# EAGLE board 12VBridgeConnector (EAGLE 9.5.2)
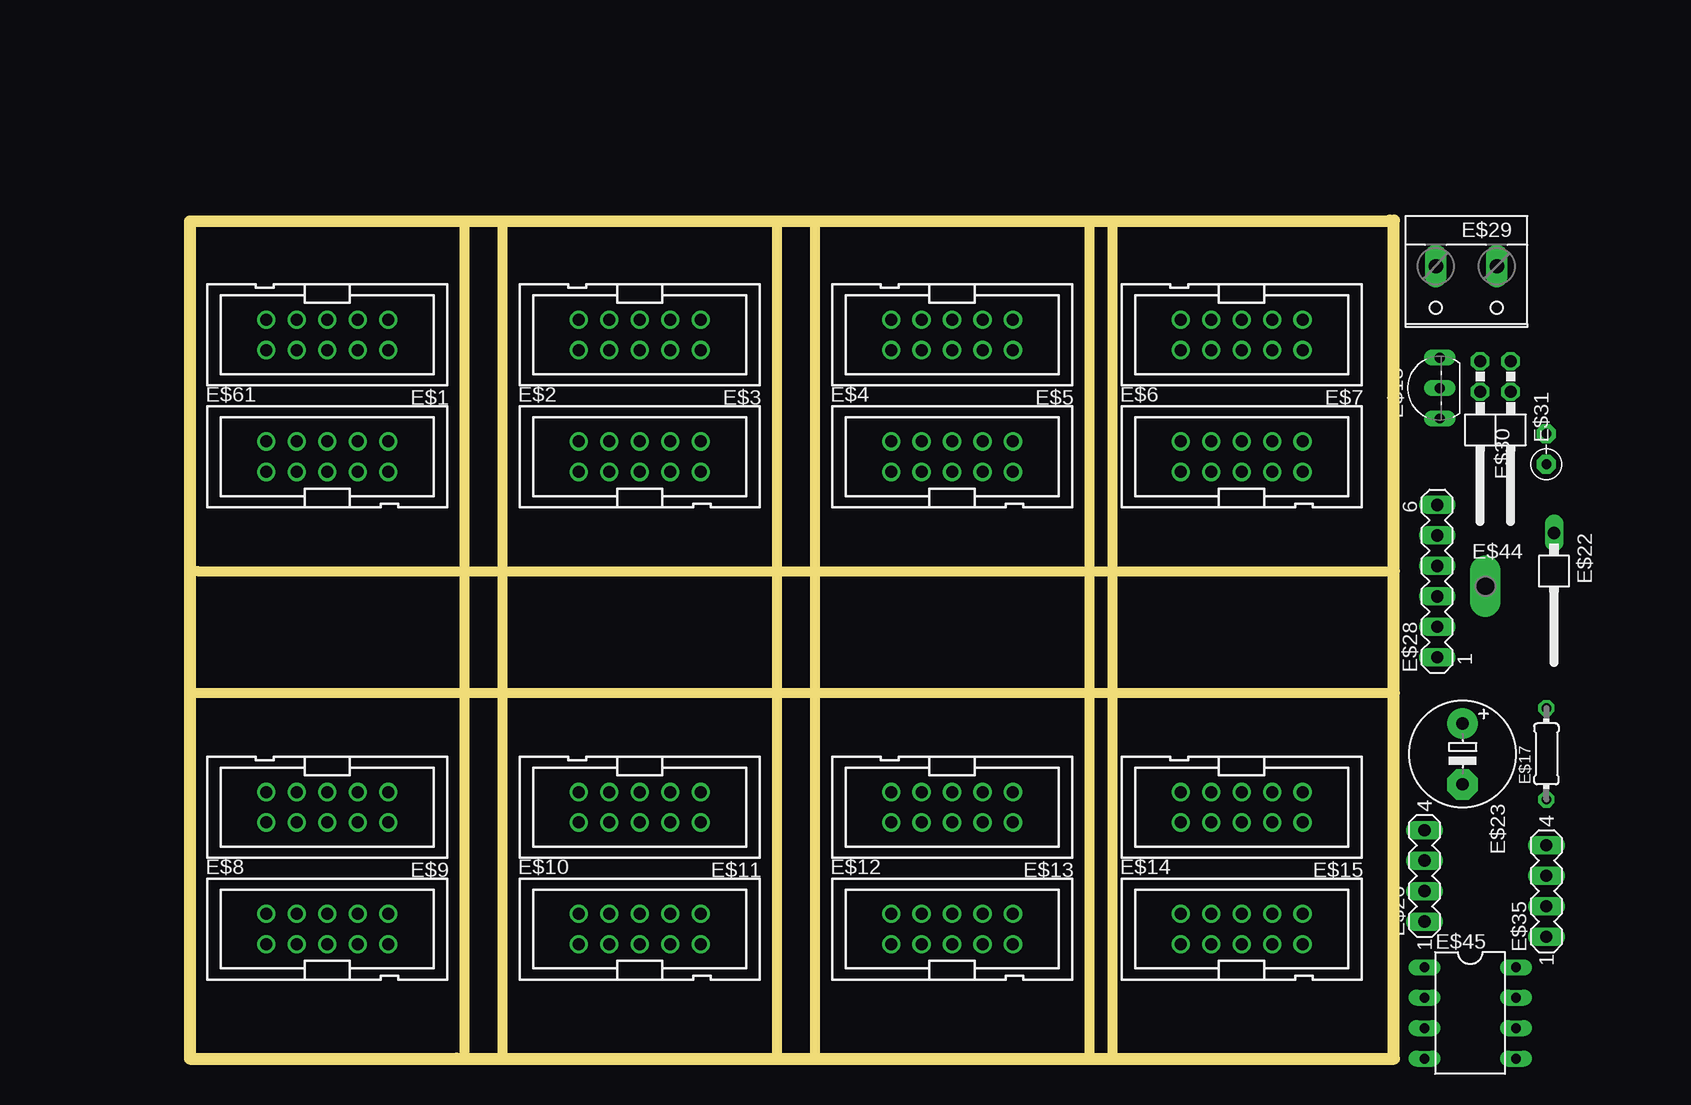
[diagram p0: board, top side]
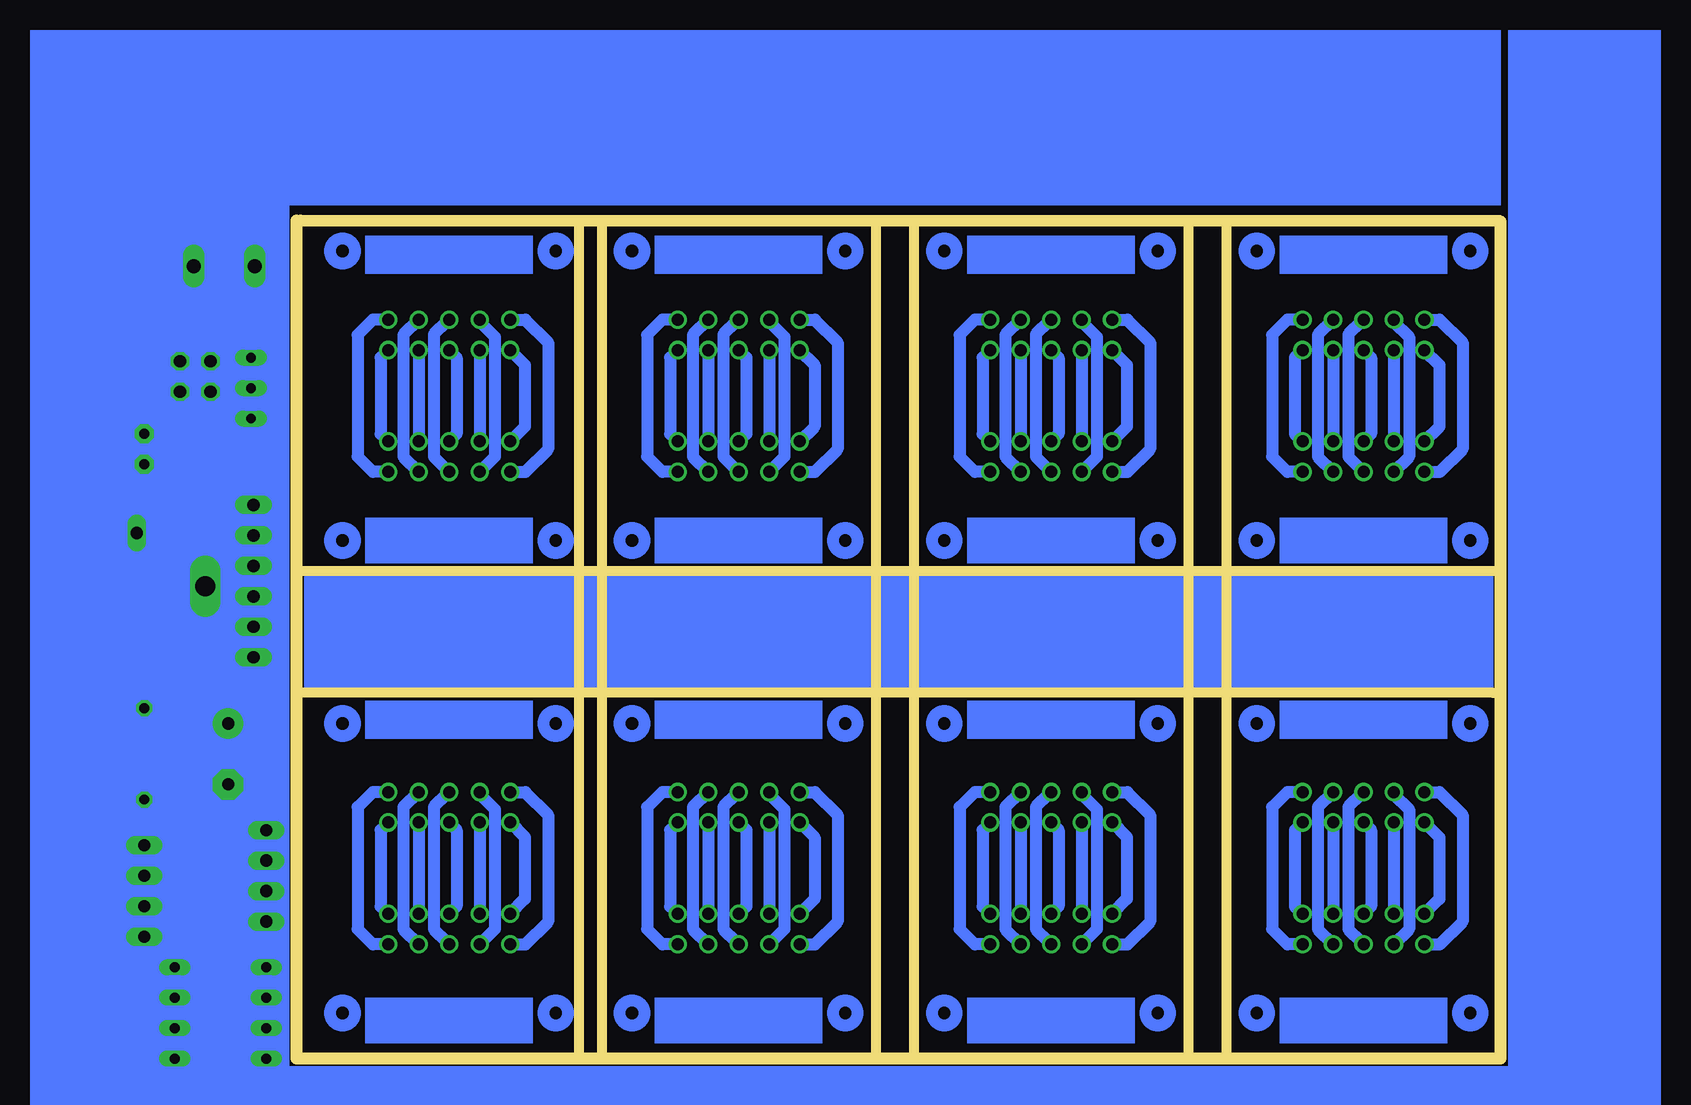
[diagram p1: board, bottom side, seen from below]

Size 100.33 x 69.85 mm. Coordinates in mm from the lower left corner, seen from the top.
Outline: 100,69.85 0,69.78 0,0 22.23,0
Outline: 22.23,0 26.04,0
Outline: 26.04,0 48.9,0
Outline: 48.9,0 52.07,0
Outline: 52.07,0 74.93,0
Outline: 74.93,0 76.83,0
Outline: 76.83,0 100.33,0 100.33,30.48
Outline: 100.33,30.48 100.33,40.64
Outline: 100.33,40.64 100.33,69.85
Outline: 22.86,69.85 22.86,0.64 22.23,0
Outline: 26.04,69.85 26.04,0
Outline: 48.9,69.85 48.9,0
Outline: 52.07,69.85 52.07,0
Outline: 74.93,69.85 74.93,0
Outline: 76.83,69.85 76.83,0
Outline: 0.64,40.64 100.33,40.64
Outline: 0.64,30.48 100.33,30.48
Copper layers (1*16): Top 0.035mm / dielectric 1.5mm / Bottom 0.035mm
Design rules "default": minimum track width 10mil, minimum drill 24mil, track to track 8mil, track to pad 8mil, pad to pad 8mil, via to via 8mil, smd to smd 8mil, copper to edge 40mil, drill to drill 8mil, minimum pad ring 10mil, minimum via ring 8mil, stop-mask expansion 4mil, vias tented up to drill 0mil, thermal gap 10mil

## Footprints (pad centres in the part's own frame; a part is rotated, then mirrored left to right if it is on the bottom)
PAK100/2500-10 = drill 1 pad 1.422: 1 -5.08,-1.27; 2 -5.08,1.27; 3 -2.54,-1.27; 4 -2.54,1.27; 5 0,-1.27; 6 0,1.27; 7 2.54,-1.27; 8 2.54,1.27; 9 5.08,-1.27; 10 5.08,1.27
0204/7 = drill 0.813 octagon: 1 -3.81,0; 2 3.81,0
TO92- = drill 0.813 long: 1 2.54,0; 2 0,0; 3 -2.54,0
1X01/90 = drill 1.016 long: 1 -1.27,-3.81
E5-8,5 = drill 1.016 pad 2.54: + -2.54,0 | drill 1.016 pad 2.54 octagon: - 2.54,0
MA04-1 = drill 1.016 long: 1 -3.81,0; 2 -1.27,0; 3 1.27,0; 4 3.81,0
MA06-1 = drill 1.016 long: 1 -6.35,0; 2 -3.81,0; 3 -1.27,0; 4 1.27,0; 5 3.81,0; 6 6.35,0
W237-132 = drill 1.194 long: 1 -2.54,-0.635; 2 2.54,-0.635
RS-2,5 = drill 0.813 pad 1.6 octagon: 1 -1.27,0; 2 1.27,0
2X02/90 = drill 1.016 octagon: 1 -1.27,-6.35; 2 -1.27,-3.81; 3 1.27,-6.35; 4 1.27,-3.81
P1-17Y = drill 1.702 pad 2.121 long: TP 0,0
DIL08 = drill 0.813 long: 1 -3.81,-3.81; 2 -1.27,-3.81; 3 1.27,-3.81; 4 3.81,-3.81; 5 3.81,3.81; 6 1.27,3.81; 7 -1.27,3.81; 8 -3.81,3.81

## Placement (x,y rotation side)
E$1  [PAK100/2500-10]  11.43,60.33 180 top
E$2  [PAK100/2500-10]  37.47,50.16 0 top
E$3  [PAK100/2500-10]  37.47,60.33 180 top
E$4  [PAK100/2500-10]  63.5,50.16 0 top
E$5  [PAK100/2500-10]  63.5,60.33 180 top
E$6  [PAK100/2500-10]  87.63,50.16 0 top
E$7  [PAK100/2500-10]  87.63,60.33 180 top
E$8  [PAK100/2500-10]  11.43,10.79 0 top
E$9  [PAK100/2500-10]  11.43,20.95 180 top
E$10  [PAK100/2500-10]  37.47,10.79 0 top
E$11  [PAK100/2500-10]  37.47,20.95 180 top
E$12  [PAK100/2500-10]  63.5,10.79 0 top
E$13  [PAK100/2500-10]  63.5,20.95 180 top
E$14  [PAK100/2500-10]  87.63,10.79 0 top
E$15  [PAK100/2500-10]  87.63,20.95 180 top
E$17  [0204/7]  113.03,25.4 90 top  (outside the outline)
E$18  [TO92-]  104.14,55.88 90 top  (outside the outline)
E$22  [1X01/90]  112.39,40.01 180 top  (outside the outline)
E$23  [E5-8,5]  106.05,25.4 270 top  (outside the outline)
E$26  [MA04-1]  102.87,15.24 90 top
E$28  [MA06-1]  103.93,39.79 90 top  (outside the outline)
E$29  [W237-132]  106.36,65.41 180 top  (outside the outline)
E$30  [RS-2,5]  113.03,50.8 90 top  (outside the outline)
E$31  [2X02/90]  108.78,51.77 180 top  (outside the outline)
E$35  [MA04-1]  113.03,13.97 90 top  (outside the outline)
E$44  [P1-17Y]  107.95,39.37 0 top  (outside the outline)
E$45  [DIL08]  106.68,3.81 270 top
E$61  [PAK100/2500-10]  11.43,50.16 0 top

## Library data of the parts
E$1-E$15 E$61 = con-3m
E$17 = eagle-ltspice
E$18 = transistor-fet
E$22 E$31 = pinhead
E$23 = ref-packages-longpad
E$26 E$28 E$35 = con-lstb
E$29 = con-wago-508
E$30 = discrete
E$44 = testpad
E$45 = 74xx-us

## Nets
S$2: E$1.10 E$61.2
S$3: E$1.8 E$61.4
S$4: E$1.6 E$61.6
S$5: E$1.4 E$61.8
S$7: E$1.2 E$61.10
S$8: E$1.9 E$61.1
S$9: E$1.7 E$61.3
S$10: E$1.5 E$61.5
S$11: E$1.3 E$61.7
S$12: E$1.1 E$61.9
S$13: E$2.2 E$3.10
S$14: E$2.4 E$3.8
S$15: E$2.6 E$3.6
S$16: E$2.8 E$3.4
S$17: E$2.10 E$3.2
S$18: E$2.1 E$3.9
S$19: E$2.3 E$3.7
S$20: E$2.5 E$3.5
S$21: E$2.7 E$3.3
S$22: E$2.9 E$3.1
S$23: E$4.2 E$5.10
S$24: E$4.4 E$5.8
S$25: E$4.6 E$5.6
S$26: E$4.8 E$5.4
S$27: E$4.10 E$5.2
S$28: E$4.1 E$5.9
S$29: E$4.3 E$5.7
S$30: E$4.5 E$5.5
S$31: E$4.7 E$5.3
S$32: E$4.9 E$5.1
S$33: E$6.2 E$7.10
S$34: E$6.4 E$7.8
S$35: E$6.6 E$7.6
S$36: E$6.8 E$7.4
S$37: E$6.10 E$7.2
S$38: E$6.1 E$7.9
S$39: E$6.3 E$7.7
S$40: E$6.5 E$7.5
S$41: E$6.7 E$7.3
S$42: E$6.9 E$7.1
S$43: E$8.2 E$9.10
S$44: E$8.4 E$9.8
S$45: E$8.6 E$9.6
S$46: E$8.8 E$9.4
S$47: E$8.10 E$9.2
S$48: E$8.1 E$9.9
S$49: E$8.3 E$9.7
S$50: E$8.5 E$9.5
S$51: E$8.7 E$9.3
S$52: E$8.9 E$9.1
S$53: E$10.2 E$11.10
S$54: E$10.4 E$11.8
S$55: E$10.6 E$11.6
S$56: E$10.8 E$11.4
S$57: E$10.10 E$11.2
S$58: E$10.1 E$11.9
S$59: E$10.3 E$11.7
S$60: E$10.5 E$11.5
S$61: E$10.7 E$11.3
S$62: E$10.9 E$11.1
S$63: E$12.2 E$13.10
S$64: E$12.4 E$13.8
S$65: E$12.6 E$13.6
S$66: E$12.8 E$13.4
S$67: E$12.10 E$13.2
S$68: E$12.1 E$13.9
S$69: E$12.3 E$13.7
S$70: E$12.5 E$13.5
S$71: E$12.7 E$13.3
S$72: E$12.9 E$13.1
S$73: E$14.2 E$15.10
S$74: E$14.4 E$15.8
S$75: E$14.6 E$15.6
S$76: E$14.8 E$15.4
S$77: E$14.10 E$15.2
S$78: E$14.1 E$15.9
S$79: E$14.3 E$15.7
S$80: E$14.5 E$15.5
S$81: E$14.7 E$15.3
S$82: E$14.9 E$15.1

## Tracks (layer width: path | path; a pad name or v marks a point on that pad's centre or on a via)
S$2
  Bottom 1.016: E$1.10 5.11,57.81 5.11,52.68 E$61.2
S$3
  Bottom 1.016: E$1.8 E$61.4
S$4
  Bottom 1.016: E$1.6 10.79,58.42 10.79,52.07 E$61.6
S$5
  Bottom 1.016: E$1.4 E$61.8
S$7
  Bottom 1.016: E$1.2 17.14,58.42 17.14,52.07 E$61.10
S$8
  Bottom 1.016: E$61.1 5.08,48.9 3.17,50.8 3.17,59.69 5.08,61.59 E$1.9
S$9
  Bottom 1.016: E$61.3 7.62,50.16 7.62,60.15 8.89,61.42 E$1.7
S$10
  Bottom 1.016: E$61.5 11.63,49.07 11.63,49.1 12.7,50.16 12.7,60.35 11.63,61.42 E$1.5
S$11
  Bottom 1.016: E$61.7 15.24,50.16 15.24,60.33 E$1.3
S$12
  Bottom 1.016: E$61.9 17.78,48.9 19.05,50.16 19.05,60.33 17.78,61.59 E$1.1
S$13
  Bottom 1.016: E$3.10 31.14,57.81 31.14,52.68 E$2.2
S$14
  Bottom 1.016: E$3.8 E$2.4
S$15
  Bottom 1.016: E$3.6 36.83,58.42 36.83,52.07 E$2.6
S$16
  Bottom 1.016: E$3.4 E$2.8
S$17
  Bottom 1.016: E$3.2 43.18,58.42 43.18,52.07 E$2.10
S$18
  Bottom 1.016: E$2.1 31.11,48.9 29.21,50.8 29.21,59.69 31.11,61.59 E$3.9
S$19
  Bottom 1.016: E$2.3 33.66,50.16 33.66,60.15 34.92,61.42 E$3.7
S$20
  Bottom 1.016: E$2.5 37.67,49.07 37.67,49.1 38.73,50.16 38.73,60.35 37.67,61.42 E$3.5
S$21
  Bottom 1.016: E$2.7 41.27,50.16 41.27,60.33 E$3.3
S$22
  Bottom 1.016: E$2.9 43.81,48.9 45.09,50.16 45.09,60.33 43.81,61.59 E$3.1
S$23
  Bottom 1.016: E$5.10 57.17,57.81 57.17,52.68 E$4.2
S$24
  Bottom 1.016: E$5.8 E$4.4
S$25
  Bottom 1.016: E$5.6 62.87,58.42 62.87,52.07 E$4.6
S$26
  Bottom 1.016: E$5.4 E$4.8
S$27
  Bottom 1.016: E$5.2 69.22,58.42 69.22,52.07 E$4.10
S$28
  Bottom 1.016: E$4.1 57.15,48.9 55.24,50.8 55.24,59.69 57.15,61.59 E$5.9
S$29
  Bottom 1.016: E$4.3 59.69,50.16 59.69,60.15 60.96,61.42 E$5.7
S$30
  Bottom 1.016: E$4.5 63.7,49.07 63.7,49.1 64.77,50.16 64.77,60.35 63.7,61.42 E$5.5
S$31
  Bottom 1.016: E$4.7 67.31,50.16 67.31,60.33 E$5.3
S$32
  Bottom 1.016: E$4.9 69.85,48.9 71.12,50.16 71.12,60.33 69.85,61.59 E$5.1
S$33
  Bottom 1.016: E$7.10 81.31,57.81 81.31,52.68 E$6.2
S$34
  Bottom 1.016: E$7.8 E$6.4
S$35
  Bottom 1.016: E$7.6 87,58.42 87,52.07 E$6.6
S$36
  Bottom 1.016: E$7.4 E$6.8
S$37
  Bottom 1.016: E$7.2 93.34,58.42 93.34,52.07 E$6.10
S$38
  Bottom 1.016: E$6.1 81.28,48.9 79.38,50.8 79.38,59.69 81.28,61.59 E$7.9
S$39
  Bottom 1.016: E$6.3 83.82,50.16 83.82,60.15 85.09,61.42 E$7.7
S$40
  Bottom 1.016: E$6.5 87.83,49.07 87.83,49.1 88.9,50.16 88.9,60.35 87.83,61.42 E$7.5
S$41
  Bottom 1.016: E$6.7 91.44,50.16 91.44,60.33 E$7.3
S$42
  Bottom 1.016: E$6.9 93.98,48.9 95.25,50.16 95.25,60.33 93.98,61.59 E$7.1
S$43
  Bottom 1.016: E$9.10 5.11,18.44 5.11,13.31 E$8.2
S$44
  Bottom 1.016: E$9.8 E$8.4
S$45
  Bottom 1.016: E$9.6 10.79,19.05 10.79,12.7 E$8.6
S$46
  Bottom 1.016: E$9.4 E$8.8
S$47
  Bottom 1.016: E$9.2 17.14,19.05 17.14,12.7 E$8.10
S$48
  Bottom 1.016: E$8.1 5.08,9.53 3.17,11.43 3.17,20.32 5.08,22.23 E$9.9
S$49
  Bottom 1.016: E$8.3 7.62,10.79 7.62,20.78 8.89,22.05 E$9.7
S$50
  Bottom 1.016: E$8.5 11.63,9.7 11.63,9.73 12.7,10.79 12.7,20.98 11.63,22.05 E$9.5
S$51
  Bottom 1.016: E$8.7 15.24,10.79 15.24,20.95 E$9.3
S$52
  Bottom 1.016: E$8.9 17.78,9.53 19.05,10.79 19.05,20.95 17.78,22.23 E$9.1
S$53
  Bottom 1.016: E$11.10 31.14,18.44 31.14,13.31 E$10.2
S$54
  Bottom 1.016: E$11.8 E$10.4
S$55
  Bottom 1.016: E$11.6 36.83,19.05 36.83,12.7 E$10.6
S$56
  Bottom 1.016: E$11.4 E$10.8
S$57
  Bottom 1.016: E$11.2 43.18,19.05 43.18,12.7 E$10.10
S$58
  Bottom 1.016: E$10.1 31.11,9.53 29.21,11.43 29.21,20.32 31.11,22.23 E$11.9
S$59
  Bottom 1.016: E$10.3 33.66,10.79 33.66,20.78 34.92,22.05 E$11.7
S$60
  Bottom 1.016: E$10.5 37.67,9.7 37.67,9.73 38.73,10.79 38.73,20.98 37.67,22.05 E$11.5
S$61
  Bottom 1.016: E$10.7 41.27,10.79 41.27,20.95 E$11.3
S$62
  Bottom 1.016: E$10.9 43.81,9.53 45.09,10.79 45.09,20.95 43.81,22.23 E$11.1
S$63
  Bottom 1.016: E$13.10 57.17,18.44 57.17,13.31 E$12.2
S$64
  Bottom 1.016: E$13.8 E$12.4
S$65
  Bottom 1.016: E$13.6 62.87,19.05 62.87,12.7 E$12.6
S$66
  Bottom 1.016: E$13.4 E$12.8
S$67
  Bottom 1.016: E$13.2 69.22,19.05 69.22,12.7 E$12.10
S$68
  Bottom 1.016: E$12.1 57.15,9.53 55.24,11.43 55.24,20.32 57.15,22.23 E$13.9
S$69
  Bottom 1.016: E$12.3 59.69,10.79 59.69,20.78 60.96,22.05 E$13.7
S$70
  Bottom 1.016: E$12.5 63.7,9.7 63.7,9.73 64.77,10.79 64.77,20.98 63.7,22.05 E$13.5
S$71
  Bottom 1.016: E$12.7 67.31,10.79 67.31,20.95 E$13.3
S$72
  Bottom 1.016: E$12.9 69.85,9.53 71.12,10.79 71.12,20.95 69.85,22.23 E$13.1
S$73
  Bottom 1.016: E$15.10 81.31,18.44 81.31,13.31 E$14.2
S$74
  Bottom 1.016: E$15.8 E$14.4
S$75
  Bottom 1.016: E$15.6 87,19.05 87,12.7 E$14.6
S$76
  Bottom 1.016: E$15.4 E$14.8
S$77
  Bottom 1.016: E$15.2 93.34,19.05 93.34,12.7 E$14.10
S$78
  Bottom 1.016: E$14.1 81.28,9.53 79.38,11.43 79.38,20.32 81.28,22.23 E$15.9
S$79
  Bottom 1.016: E$14.3 83.82,10.79 83.82,20.78 85.09,22.05 E$15.7
S$80
  Bottom 1.016: E$14.5 87.83,9.7 87.83,9.73 88.9,10.79 88.9,20.98 87.83,22.05 E$15.5
S$81
  Bottom 1.016: E$14.7 91.44,10.79 91.44,20.95 E$15.3
S$82
  Bottom 1.016: E$14.9 93.98,9.53 95.25,10.79 95.25,20.95 93.98,22.23 E$15.1
(copper drawn outside any net)
  shapes: Bottom area x21, Bottom circle x32